# Allegro board aqs1_controller.brd
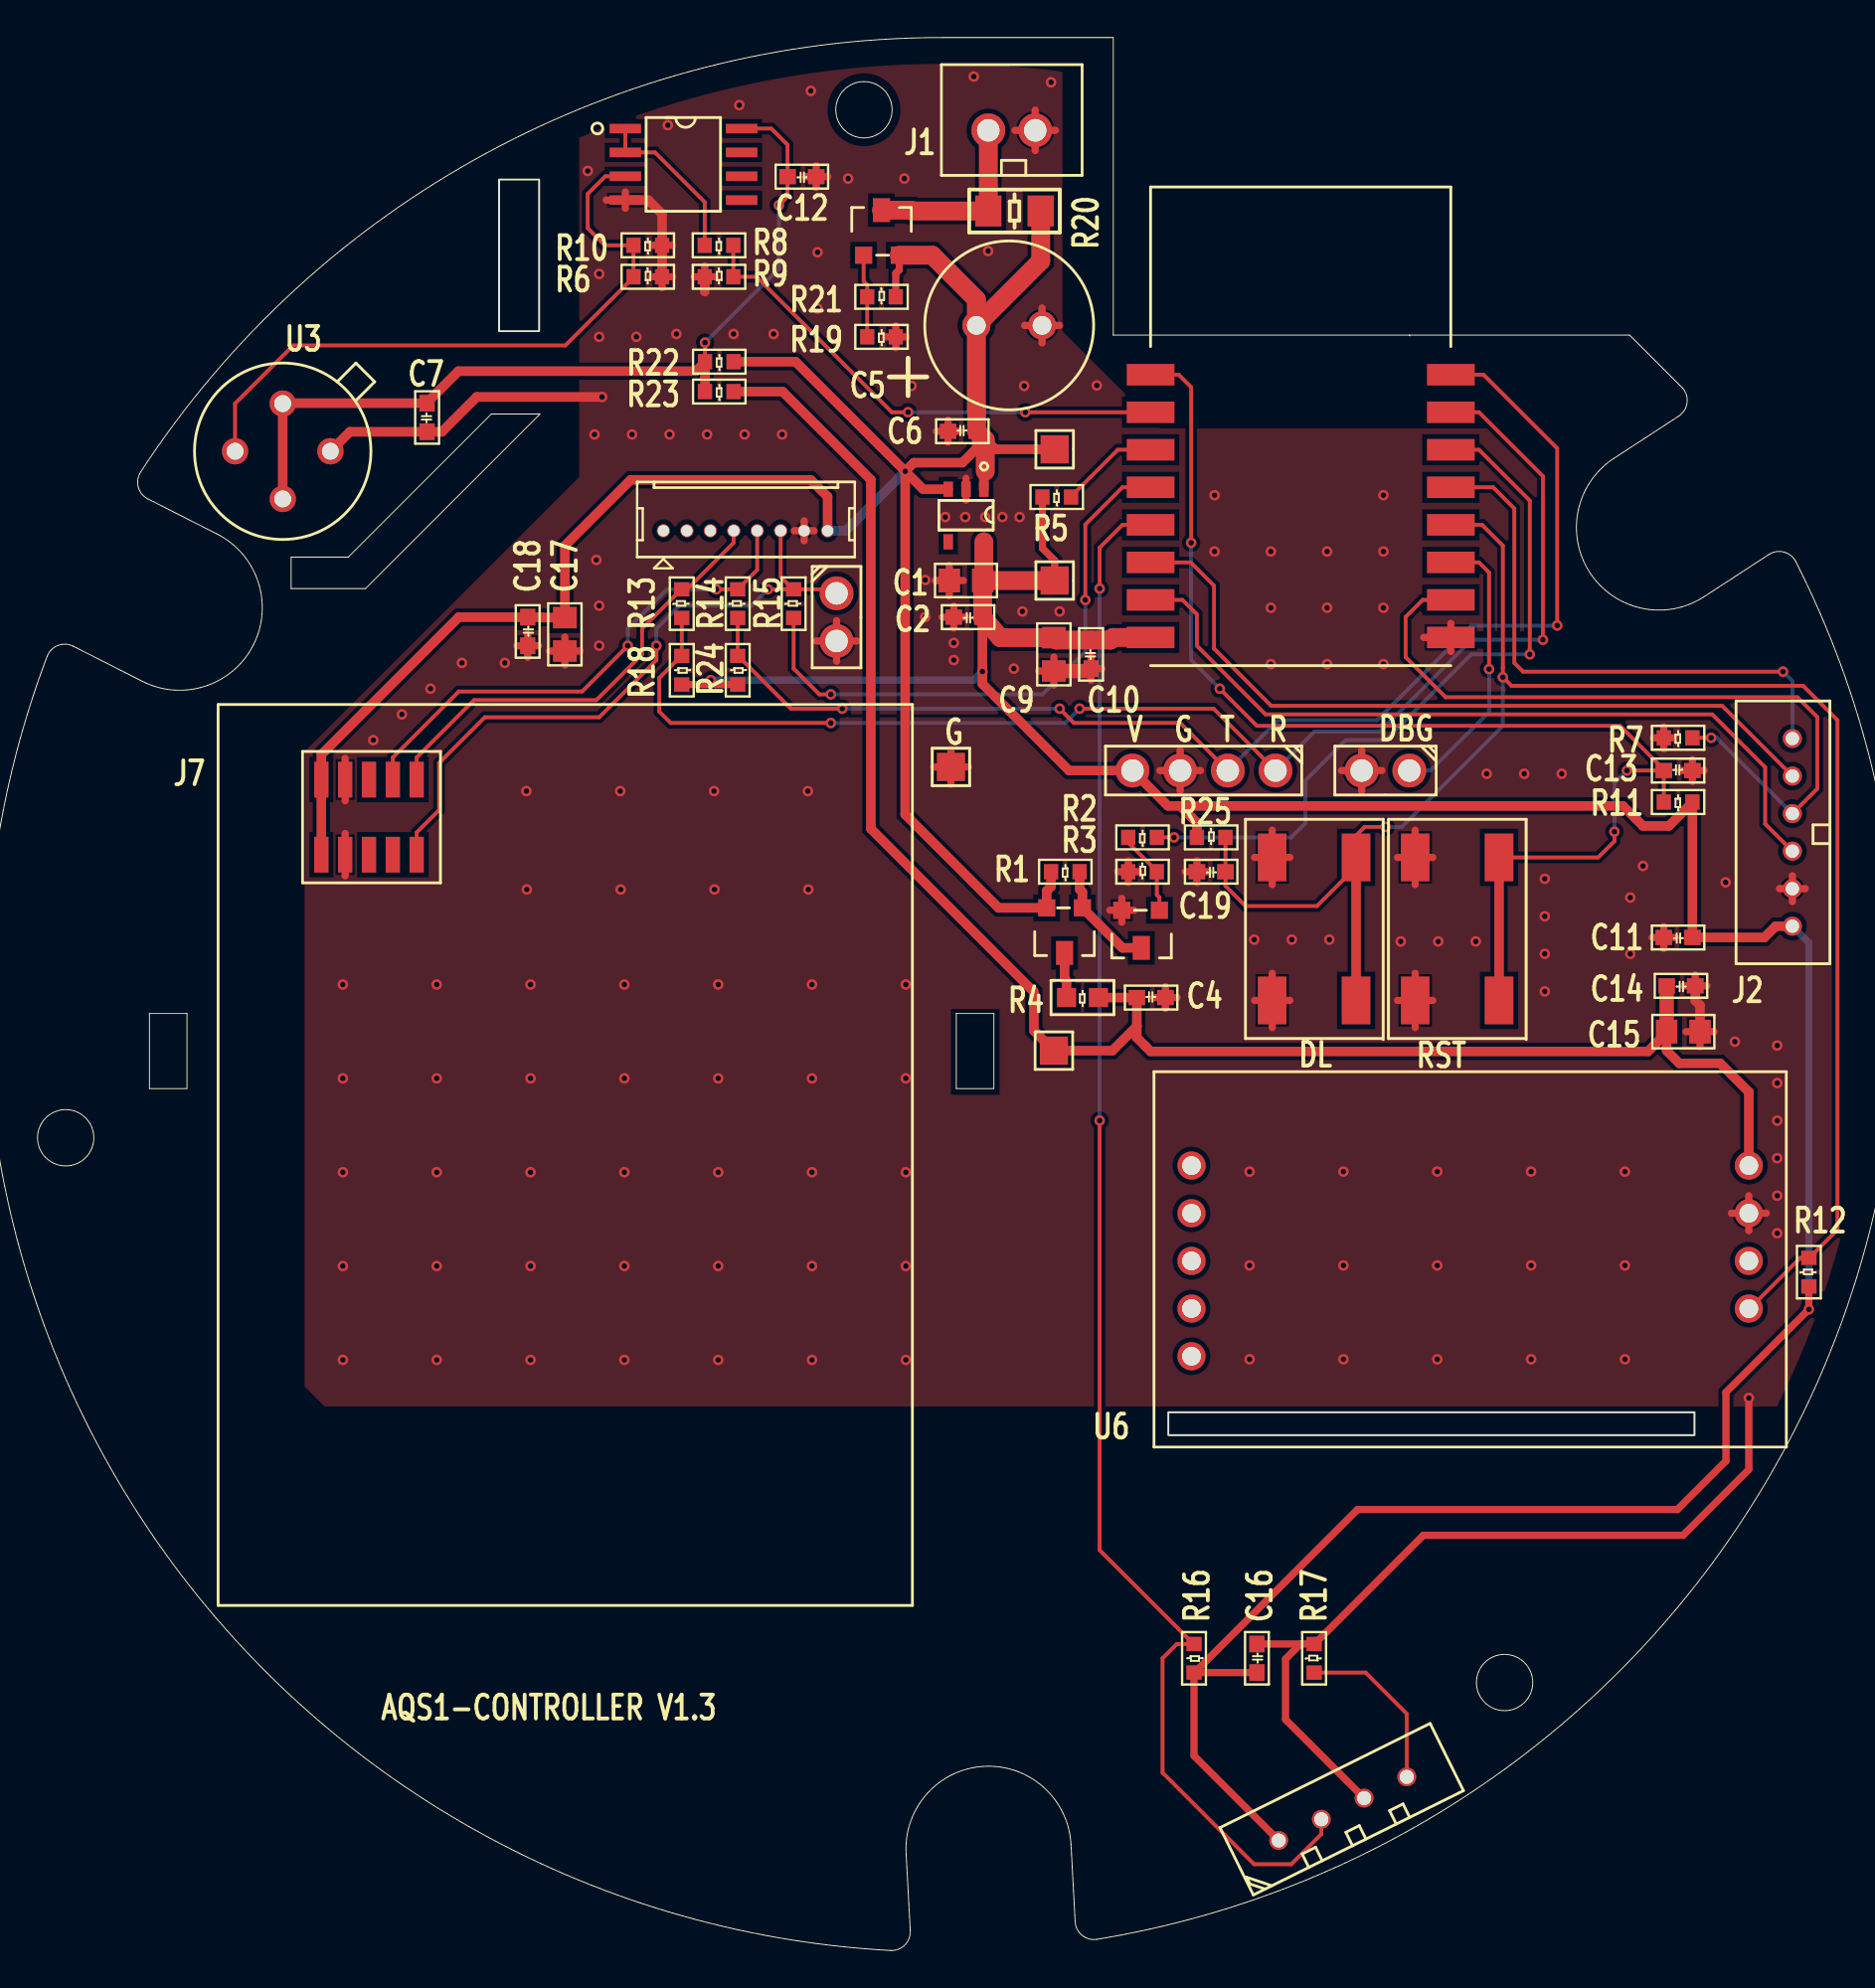
[diagram p0: board, top side]
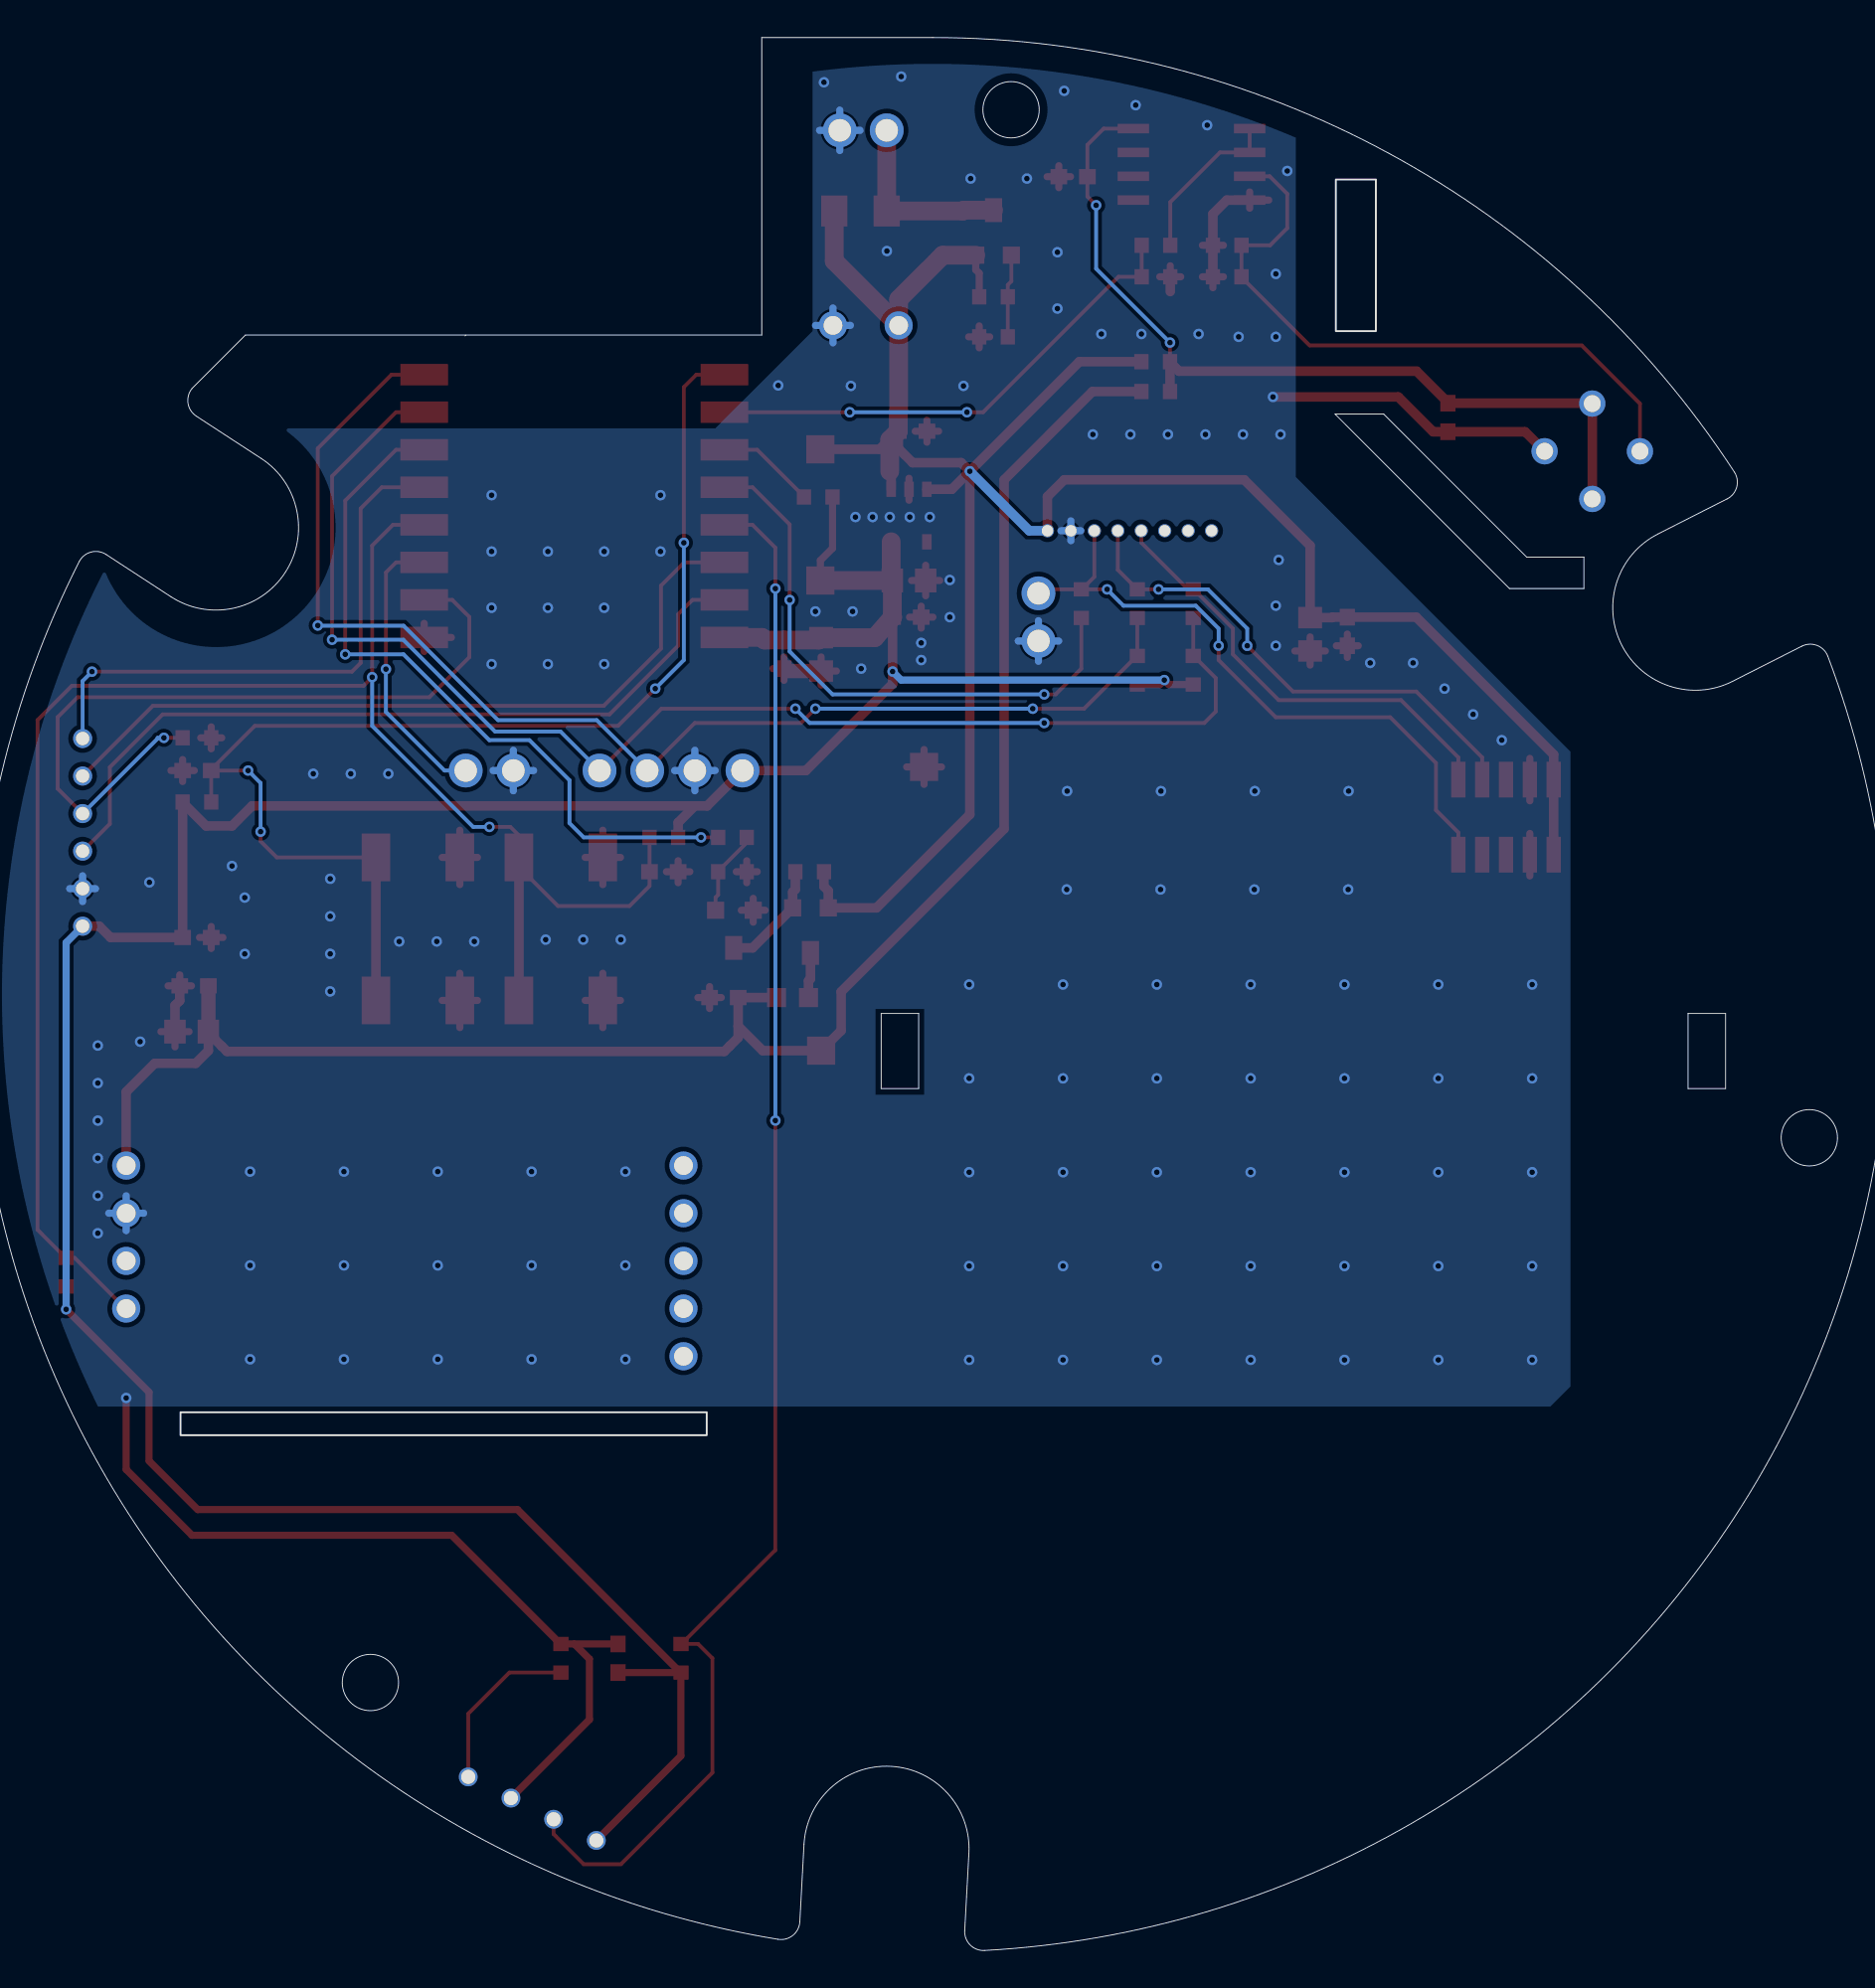
[diagram p1: board, bottom side, seen from below]

Outline 102 x 101.93 mm; copper layers: TOP, BOTTOM. Coordinates in mm from the lower left corner of the outline.
Outline path: circle c4.28,43.3 r1.5 ; rectangle 27.38,86.28 29.51,94.36 ; circle c46.82,98.08 r1.5 ; rectangle 63.04,27.46 91.08,28.67 ; circle c80.96,14.28 r1.5 ; 75.87,86.07 75.92,86.03 ; 3.29,68.96 arc(3.87,69.53) 4.68,69.49 8.37,67.62 arc(14.28,69.56) 12.35,75.47 8.66,77.34 arc(8.15,77.97) 8.28,78.78 arc(26.7,95.77) 51,101.93 60.11,101.93 60.11,86.07 87.62,86.07 90.47,83.23 arc(90.68,82.44) 90.24,81.75 86.78,79.5 arc(85.49,73.41) 91.58,72.13 95.04,74.38 arc(95.85,74.51) 96.48,74 arc(96.48,27.85) 59.24,0.59 arc(58.45,0.8) 58.08,1.53 57.85,5.65 arc(53.22,9.81) 49.07,5.18 49.29,1.05 arc(49,0.29) 48.24,0 arc(8.27,23.08) 3.29,68.96 ; 8.74,49.93 8.74,45.93 10.74,45.93 10.74,49.93 8.74,49.93 ; 16.29,74.24 16.29,72.57 20.26,72.57 29.55,81.86 26.96,81.86 19.34,74.24 16.29,74.24 ; 51.74,49.93 51.74,45.93 53.74,45.93 53.74,49.93 51.74,49.93

## Design rules (mm)
nets with their own width: min track width 0.381; nets +3.3V +5V GND SENSOR_5V

## Placement (name value [footprint] x y rotation side)
C1  10uF-SC0805  [SC0805]  52.26 72.99 0 top
C2  0.1uF-SC0603  [SC0603]  52.37 71.04 180 top
C4  0.1uF-SC0603  [SC0603]  62.12 50.77 0 top
C5  470uF/25V  [CAP8X11_5]  52.81 86.59 0 top
C6  0.1uF-SC0603  [SC0603]  52.07 80.95 0 top
C7  0.1uF-SC0603  [SC0603]  23.54 81.68 90 top
C9  10uF-SC0805  [SC0805]  56.94 69.06 270 top
C10  0.1uF-SC0603  [SC0603]  58.92 69.06 90 top
C11  0.1uF-SC0603  [SC0603]  90.21 53.97 180 top
C12  0.1uF-SC0603  [SC0603]  43.51 94.51 180 top
C13  0.1uF-SC0603  [SC0603]  90.21 62.87 0 top
C14  0.1uF-SC0603  [SC0603]  90.36 51.4 180 top
C15  10uF-SC0805  [SC0805]  90.49 48.96 0 top
C16  0.1uF-SC0603  [SC0603]  67.76 15.57 270 top
C17  10uF-SC0805  [SC0805]  30.88 70.13 270 top
C18  0.1uF-SC0603  [SC0603]  28.9 70.28 270 top
C19  0.1uF-SC0603  [SC0603]  65.32 57.48 180 top
J1  J2x1  [CON2_2M5]  50.95 100.48 270 top
J2  J6x1  [CON6_2M]  92.8 52.58 0 top
J3  CON4  [CON1X4_254]  68.75 62.87 270 top
J5  CON2  [CON1X2_254]  74.61 62.87 270 top
J6  CON8  [A1252WV_8P]  34.73 78.25 180 top
J7  CON10A  [PMS7003]  12.4 19.89 0 top
J8  CON2  [CON1X2_254]  45.36 71.04 0 top
Q1  MMBT3904  [SOT-23]  62.57 55.42 180 top
Q2  CJK2333  [SOT-23-3L]  58.46 55.55 180 top
Q3  CJK2333  [SOT-23-3L]  46.8 90.33 0 top
R1  20K-SR0603  [SR0603]  57.55 57.48 180 top
R2  2K-SR0603  [SR0603]  61.67 59.31 180 top
R3  10K-SR0603  [SR0603]  61.67 57.48 0 top
R4  MF-FSMF050X  [FUSE_SMD_0603]  58.47 50.77 180 top
R5  10K-SR0603  [SR0603]  57.09 77.44 180 top
R6  28K-SR0603  [SR0603]  35.3 89.18 0 top
R7  10K-SR0603  [SR0603]  90.21 64.61 180 top
R8  30K-SR0603  [SR0603]  39.1 90.85 180 top
R9  10K-SR0603  [SR0603]  39.1 89.18 0 top
R10  10M-SR0603  [SR0603]  35.3 90.85 180 top
R11  10K-SR0603  [SR0603]  90.21 61.19 180 top
R12  10K-SR0603  [SR0603]  97.18 36.14 90 top
R13  0-SR0603  [SR0603]  37.11 71.76 90 top
R14  0-SR0603  [SR0603]  40.09 71.76 90 top
R15  0-SR0603  [SR0603]  43.07 71.76 90 top
R16  10K-SR0603  [SR0603]  64.41 15.57 270 top
R17  10K-SR0603  [SR0603]  70.81 15.57 90 top
R18  10K-SR0603  [SR0603]  37.11 68.21 270 top
R19  20K-SR0603  [SR0603]  47.76 85.98 180 top
R20  0-SR1206-NC  [SR1206]  54.84 92.68 180 top
R21  10K-SR0603-NC  [SR0603]  47.76 88.11 0 top
R22  0-SR0603  [SR0603]  39.11 84.65 180 top
R23  0-SR0603-NC  [SR0603]  39.11 83.06 180 top
R24  10K-SR0603  [SR0603]  40.09 68.21 270 top
R25  10K-SR0603  [SR0603]  65.32 59.31 0 top
TP1  SIG  [SMD_SIG_60]  56.98 72.99 0 top
TP3  SIG  [SMD_SIG_60]  51.46 63.06 0 top
TP4  SIG  [SMD_SIG_60]  56.94 47.94 0 top
TP5  SIG  [SMD_SIG_60]  56.98 79.98 0 top
U1  SPX3819  [SOT23-5]  52.26 76.46 270 top
U2  -  [ESP-12S]  62.1 83.96 270 top
U3  GSBT11-D18  [HCHO]  15.85 79.88 0 top
U4  lm358  [SOIC8-50-244]  37.2 95.17 0 top
U5  BUTTON  [SW-4]  78.43 54.43 180 top
U6  -  [CM1106]  64.28 41.82 0 top
U7  -  [DHT12]  68.92 5.86 26.4 top
U8  BUTTON  [SW-4]  70.81 54.43 180 top

## Library data of the parts
C1 C2 C4 C6 C7 C9-C11 C13-C19 = CAP NP
C5 = CAP POL
C12 = CAP NP: room: USB+5V
J1 = J2x1
J2 = J6x1
J3 = CON4
J5 J8 = CON2
J6 = CON8
J7 = CON10A
Q1 = 2N1069
Q2 Q3 = PMOS
R1-R25 = R
TP1 TP3-TP5 = TP-SQ_1
U1 = SPX3819
U2 = ESP-07
U3 = HCHO
U4 = lm358
U5 U8 = BUTTON
U6 = CM1106
U7 = DHT12

## Footprints (pads in the part's own frame, mm; a bottom-side part is the same pattern mirrored in y, then rotated)
A1252WV_8P
  round 0.7 hole 0.6: 1(-10.15,2.6) 2(-8.9,2.6) 3(-7.65,2.6) 4(-6.4,2.6) 5(-5.15,2.6) 6(-3.9,2.6) 7(-2.65,2.6) 8(-1.4,2.6)
CAP8X11_5
  round 1.5 hole 1: 1(0,0) 2(3.5,0)
CM1106
  round 1.5 hole 1: 1(0,0) 2(0,-2.54) 3(0,-5.08) 4(0,-7.62) 5(0,-10.16) 6(29.7,0) 7(29.7,-2.54) 8(29.7,-5.08) 9(29.7,-7.62)
CON1X2_254
  round 1.8 hole 1.2: 1(0,1.27) 2(0,-1.27)
CON1X4_254
  round 1.8 hole 1.2: 1(0,0) 2(0,-2.54) 3(0,-5.08) 4(0,-7.62)
CON2_2M5
  round 1.8 hole 1.2: 1(3.5,2.5) 2(3.5,5)
CON6_2M
  round 1.016 hole 0.711: 1(3.5,2) 2(3.5,4) 3(3.5,6) 4(3.5,8) 5(3.5,10) 6(3.5,12)
DHT12
  round 1 hole 0.75: 1(0,0) 2(2.54,0) 3(5.08,0) 4(7.62,0)
ESP-12S
  rect 1.143x2.54 smd: 1(0,0) 2(2,0) 3(4,0) 4(6,0) 5(8,0) 6(10,0) 7(12,0) 8(14,0) 9(14,16) 10(12,16) 11(10,16) 12(8,16) 13(6,16) 14(4,16) 15(2,16) 16(0,16)
FUSE_SMD_0603
  rect 1.016x1.016 smd: 1(0.85,0) 2(-0.85,0)
HCHO
  round 1.4 hole 0.9: 1(0,2.54) 2(2.54,0) 3(0,-2.54) 4(-2.54,0)
PMS7003
  rect 0.762x1.905 smd: 1(5.5,42.5) 2(5.5,38.5) 3(6.77,42.5) 4(6.77,38.5) 5(8.04,42.5) 6(8.04,38.5) 7(9.31,42.5) 8(9.31,38.5) 9(10.58,42.5) 10(10.58,38.5)
SC0603
  rect 0.889x0.813 smd: 1(-0.762,0) 2(0.762,0)
SC0805
  rect 1.143x1.27 smd: 1(-0.889,0) 2(0.889,0)
SMD_SIG_60
  rect 1.5x1.5 smd: 1(0,0)
SOIC8-50-244
  rect 1.676x0.508 smd: 1(-3.099,1.905) 2(-3.099,0.635) 3(-3.099,-0.635) 4(-3.099,-1.905) 5(3.099,-1.905) 6(3.099,-0.635) 7(3.099,0.635) 8(3.099,1.905)
SOT23-5
  rect 0.813x0.508 smd: 1(-1.4,0.95) 2(-1.4,0) 3(-1.4,-0.95) 4(1.4,-0.95) 5(1.399,0.95)
SOT-23
  rect 0.914x0.914 smd: 1(0,0) 2(2.005,0)
  rect 0.914x1.27 smd: 3(0.965,2.005)
SOT-23-3L
  rect 0.914x0.914 smd: 1(0,0) 2(1.9,0)
  rect 0.914x1.27 smd: 3(0.95,2.4)
SR0603
  rect 0.762x0.813 smd: 1(-0.762,0) 2(0.762,0)
SR1206
  rect 1.397x1.651 smd: 1(-1.397,0) 2(1.397,0)
SW-4
  rect 1.524x2.54 smd: 1(-2.235,3.81) 2(2.235,3.81) 3(-2.235,-3.81) 4(2.235,-3.81)

## Nets
+3.3V: C1.2 C2.1 C9.1 C10.2 C11.1 C16.2 J2.1 J3.4 R5.2 R11.1 R12.1 R16.2 R18.2 R24.2 R25.1 TP1.1 U1.5(VOUT) U2.8(VCC) U7.1(VDD)
+5V: C5.1 C6.2 C17.1 C18.1 J6.1 J7.1 J7.2 Q2.2(S) Q3.2(S) R1.2 R20.1 R21.2 R22.1 TP5.1 U1.1(VI N) U1.3(EN)
GND: C1.1 C2.2 C4.2 C5.2 C6.1 C7.1 C9.2 C10.1 C11.2 C12.1 C13.2 C14.1 C15.2 C16.1 C17.2 C18.2 C19.2 J1.2 J2.2 J3.3 J5.2 J6.2 J7.3 J7.4 J8.2 Q1.2(E) R3.1 R6.2 R7.2 R9.1 R10.1 R17.2 R19.1 TP3.1 U1.2(GND) U2.9(GND) U3.2 U4.4(GND) U5.2 U5.4 U6.7(GND) U7.3(GND) U8.2 U8.4
VCC_IN: J1.1 Q3.3(D) R20.2
AD: R6.1 R10.2 U3.4 U4.3(IN1+)
CO2_PWM: C19.1 R12.2 R25.2 U2.12(GPIO0) U6.9(PWM) U8.1 U8.3
DEBUG_T: J5.1 U2.11(GPIO2)
HCHO_POWER: C7.2 C12.2 R22.2 R23.2 U3.1 U3.3 U4.8(VCC)
ID_BUTTON: J2.3 U2.7(GPIO13)
IO4: J2.6 U2.13(GPIO4)
IO12: J2.5 U2.6(GPIO12)
IO15: J2.4 R7.1 U2.10(GPIO15)
IO16: R15.1 U2.4(GPIO16)
PM_R: J6.4 J7.7 R14.2
PM_SET: J6.3 J7.10 J8.1 R15.2
PM_T: J6.5 J7.9 R13.2
RXD: J3.1 R13.1 R18.1 U2.15(RXD)
SDA: R16.1 U2.5(GPIO14) U7.2(SDA)
SENSOR_5V: C4.1 C14.2 C15.1 R4.2 R23.1 TP4.1 U6.6(VCC)
SENSOR_POWER: R2.1 U2.14(GPIO5)
TXD: J3.2 R14.1 R24.1 U2.16(TXD)
VOC_AD: R8.1 R9.2 U2.2(ADC)
WIFI_RST: C13.1 R11.2 U2.1(RESET) U5.1 U5.3
N16844653: R5.1 U2.3(CH_PD)
N17234915: Q2.3(D) R4.1
N17234940: Q1.3(C) Q2.1(G) R1.1
N17269842: R8.2 U4.1(OUT1) U4.2(IN1-)
N17294875: R17.1 U7.4(SCL)
N17309693: Q1.1(B) R2.2 R3.2
N17330411: Q3.1(G) R19.2 R21.1

Pads without a net: J6 6 7 8; J7 5 6 8; U1 4; U4 5 6 7; U6 1 2 3 4 5 8

## Via types
v1: diameter 0.559, hole 0.305, TOP to BOTTOM, 175 vias

## Routing (per net, layer and track width the routed paths; a pad name or vN(x,y) marks a point on that pad's centre or on a via; arc(x,y) is an arc through that point)
+3.3V: length 179
  TOP w0.381: U7.1 64.41,10.37 R16.2 64.44,14.81 ; R5.2 56.33,74.71 56.98,74.06 TP1.1 ; 64.44,14.81 73.12,23.49 90.17,23.49 92.76,26.08 92.76,29.74 v1(97.18,34.16) R12.1 ; 64.44,14.81 C16.2 ; R24.2 38.89,67.45 v1(38.65,67.69) 38.42,67.45 R18.2 ; 53.13,70.58 C2.1
  TOP w0.508: 90.97,61.17 89.72,59.92 88.34,59.92 87.27,60.98 63.67,60.98 ; 90.97,61.17 R11.1 ; 90.97,61.17 C11.1 94.81,53.97 95.41,54.58 J2.1 ; R25.1 64.56,60.09 63.67,60.98 ; 63.67,60.98 63.02,60.98 J3.4 57.75,62.87 53.13,67.49 v1(53.13,68.15) 53.13,70.58
  TOP w1: U1.5 53.21,73.06 C1.2 ; U2.8 60.09,69.96 59.96,69.82 C10.2 57.07,69.82 C9.1 54.08,69.95 C2.1 53.15,71.14 C1.2 ; C1.2 TP1.1
  BOTTOM w0.381: v1(53.13,68.15) 52.68,67.69 v1(38.65,67.69) ; v1(97.18,34.16) 97.18,53.7 J2.1
+5V: length 127.5
  TOP w0.381: R21.2 48.52,89.37 48.7,89.55 Q3.2
  TOP w0.508: TP5.1 53.83,79.98 52.87,80.95 C6.2 52.83,80.03 52.07,79.27 49.47,79.27 v1(49.02,78.81) ; J6.1 44.88,77.46 43.99,78.36 34.39,78.36 30.88,74.85 C17.1 29.71,71.02 29.69,71.04 C18.1 25.23,71.04 17.9,63.72 J7.1 J7.2 ; U1.3 49.98,77.86 v1(49.02,78.81) ; R1.2 56.79,56.69 56.56,56.46 Q2.2 53.99,55.55 49.02,60.53 v1(49.02,78.81) ; v1(49.02,78.81) 43.18,84.65 R22.1 ; U1.1 53.21,78.74 53.28,78.81
  TOP w1: C5.1 52.81,87.98 50.46,90.33 Q3.2 ; C5.1 56.24,90.02 R20.1 ; C5.1 52.81,82 52.83,81.98 C6.2 53.28,80.49 53.28,78.81
  BOTTOM w0.508: J6.1 45.85,75.65 v1(49.02,78.81)
GND: length 211.5
  TOP w0.381: C13.2 91.59,62.87 ; C13.2 90.35,62.87 ; C13.2 90.97,62.28 ; C13.2 90.97,63.45 ; 35.5,89.18 R6.2 ; R6.2 36.62,89.18 ; R6.2 36.06,88.59 ; U5.4 76.2,59.69 ; U5.4 77.14,58.24 ; U5.4 76.2,56.79 ; U5.4 75.26,58.24 ; J5.2 73.34,63.95 ; J5.2 74.42,62.87 ; J5.2 72.27,62.87 ; J5.2 73.34,61.79 ; U8.2 69.52,50.62 ; U8.2 68.58,52.07 ; U8.2 68.58,49.17 ; U8.2 67.64,50.62 ; 70.09,16.33 R17.2 70.84,16.33 76.63,22.12 90.47,22.12 93.98,25.63 v1(93.98,29.44) ; 70.09,16.33 69.29,15.53 69.29,12.3 U7.3 ; 70.09,16.33 C16.1 ; 54.87,96.98 J1.2 ; J1.2 55.95,98.06 ; J1.2 55.95,95.9 ; J1.2 57.03,96.98 ; Q1.2 60.56,56.06 ; Q1.2 61.2,55.42 ; Q1.2 60.56,54.79 ; Q1.2 59.93,55.42 ; 58.92,67.68 C10.1 ; C10.1 58.92,68.92 ; C10.1 59.51,68.3 ; C10.1 58.34,68.3 ; 34.1,92.83 U4.4 ; U4.4 33.09,93.26 ; U4.4 34.1,93.7 ; C4.2 62.89,51.36 ; C4.2 62.89,50.19 ; C4.2 62.26,50.77 ; C4.2 63.51,50.77 ; 56.31,85.66 C5.2 ; C5.2 57.24,86.59 ; C5.2 55.38,86.59 ; C5.2 56.31,87.51 ; C17.2 31.7,69.24 ; C17.2 30.88,69.99 ; C17.2 30.88,68.49 ; C17.2 30.07,69.24 ; R19.1 49.08,85.98 ; R19.1 48.52,86.56 ; R19.1 47.96,85.98 ; R19.1 48.52,85.39 ; C15.2 92.12,48.96 ; C15.2 91.37,48.14 ; C15.2 90.63,48.96 ; 45.36,68.69 J8.2 ; J8.2 44.28,69.77 ; J8.2 46.44,69.77 ; J8.2 45.36,70.85 ; C12.1 44.27,95.1 ; C12.1 43.65,94.51 ; C12.1 44.27,93.93 ; C12.1 44.9,94.51 ; 35.5,90.85 R10.1 36.62,90.85 ; 88.82,53.97 C11.2 ; C11.2 89.44,54.56 ; C11.2 89.44,53.39 ; C11.2 90.07,53.97 ; 64.56,56.89 C19.2 ; C19.2 64.56,58.06 ; C19.2 63.94,57.48 ; C19.2 65.18,57.48 ; 90.5,51.4 91.12,51.4 ; 91.12,51.4 91.12,51.98 ; 91.12,51.4 91.74,51.4 ; J2.2 96.3,57.26 ; J2.2 96.98,56.58 ; J2.2 96.3,55.89 ; J2.2 95.61,56.58 ; C18.2 28.9,70.14 ; C18.2 28.9,68.9 ; C18.2 28.32,69.52 ; C18.2 29.49,69.52 ; 68.58,56.79 U8.4 ; U8.4 68.58,59.69 ; U8.4 69.52,58.24 ; U8.4 67.64,58.24 ; 19.17,57.26 J7.4 19.17,59.52 ; 51.37,72.18 C1.1 ; C1.1 51.37,73.81 ; C1.1 52.12,72.99 ; C1.1 50.62,72.99 ; R9.1 38.34,89.76 ; R9.1 37.78,89.18 ; R9.1 38.89,89.18 ; 63.67,61.79 J3.3 ; J3.3 63.67,63.95 ; J3.3 62.59,62.87 ; J3.3 64.75,62.87 ; 75.26,50.62 U5.2 ; U5.2 77.14,50.62 ; U5.2 76.2,49.17 ; U5.2 76.2,52.07 ; C6.1 51.93,80.95 ; C6.1 51.3,80.36 ; C6.1 51.3,81.53 ; C6.1 50.68,80.95 ; C2.2 51.61,71.63 ; C2.2 50.99,71.04 ; C2.2 52.23,71.04 ; C2.2 51.61,70.46 ; 89.44,64.03 R7.2 ; R7.2 90,64.61 ; R7.2 88.89,64.61 ; R7.2 89.44,65.2 ; 52.26,77.27 U1.2 52.26,78.44 ; 60.9,56.89 R3.1 ; R3.1 60.9,58.06 ; R3.1 61.46,57.48 ; R3.1 60.35,57.48 ; J6.2 43.63,76.17 ; J6.2 43.63,75.12 ; J6.2 43.1,75.65 ; J6.2 44.16,75.65 ; 76.65,69.96 U2.9 ; U2.9 78.1,70.71 ; U2.9 78.1,69.21 ; U6.7 94.9,39.28 ; U6.7 93.98,40.21 ; U6.7 93.05,39.28 ; U6.7 93.98,38.35 ; 51.46,62.13 TP3.1 ; TP3.1 52.38,63.06 ; TP3.1 50.53,63.06 ; TP3.1 51.46,63.99 ; 56.13,68.17 C9.2 ; C9.2 56.94,67.42 ; C9.2 56.94,68.92 ; 19.17,61.26 J7.3 19.17,63.52
  TOP w0.508: v1(32.86,82.78) 26.19,82.78 24.33,80.92 C7.1 19.42,80.92 U3.2 ; 38.34,88.39 R9.1 ; C15.2 91.37,50.35 91.12,50.61 91.12,51.4 ; U4.4 35.32,93.26 36.06,92.52 R10.1 R6.2
  TOP w0.762: C9.2 58.8,68.17 C10.1
  BOTTOM w0.381: J1.2 57.03,96.98 ; J1.2 55.95,98.06 ; J1.2 55.95,95.9 ; J1.2 54.87,96.98 ; 56.31,85.66 C5.2 ; C5.2 57.24,86.59 ; C5.2 56.31,87.51 ; C5.2 55.38,86.59 ; 44.28,69.77 J8.2 ; J8.2 46.44,69.77 ; J8.2 45.36,70.85 ; J8.2 45.36,68.69 ; J6.2 43.63,76.17 ; J6.2 44.16,75.65 ; J6.2 43.1,75.65 ; J6.2 43.63,75.12 ; 73.34,61.79 J5.2 ; J5.2 73.34,63.95 ; J5.2 72.27,62.87 ; J5.2 74.42,62.87 ; U6.7 93.98,40.21 ; U6.7 93.98,38.35 ; U6.7 93.05,39.28 ; U6.7 94.9,39.28 ; 96.3,55.89 J2.2 ; J2.2 95.61,56.58 ; J2.2 96.3,57.26 ; J2.2 96.98,56.58 ; J3.3 63.67,63.95 ; J3.3 62.59,62.87 ; J3.3 64.75,62.87 ; J3.3 63.67,61.79
  vias: v1(19.05,51.47) v1(19.05,46.47) v1(19.05,41.47) v1(19.05,36.47) v1(19.05,31.47) v1(20.67,64.49) v1(22.2,65.86) v1(23.72,67.23) v1(24.05,51.47) v1(24.05,46.47) v1(24.05,41.47) v1(24.05,36.47) v1(24.05,31.47) v1(25.4,68.6) v1(27.68,68.6) v1(28.83,61.77) v1(28.86,56.53) v1(29.05,51.47) v1(29.05,46.47) v1(29.05,41.47) v1(29.05,36.47) v1(29.05,31.47) v1(32.1,94.82) v1(32.46,80.78) v1(32.56,74.09) v1(32.71,89.33) v1(32.71,85.98) v1(32.71,71.65) v1(32.71,69.52) v1(33.83,61.77) v1(33.86,56.53) v1(34.05,51.47) v1(34.05,46.47) v1(34.05,41.47) v1(34.05,36.47) v1(34.05,31.47) v1(34.46,80.78) v1(34.69,85.98) v1(36.37,97.25) v1(36.46,80.78) v1(36.83,86.13) v1(38.46,80.78) v1(38.83,61.77) v1(38.86,56.53) v1(39.05,51.47) v1(39.05,46.47) v1(39.05,41.47) v1(39.05,36.47) v1(39.05,31.47) v1(39.87,86.13) v1(40.18,98.32) v1(40.46,80.78) v1(42.01,86.13) v1(42.46,80.78) v1(43.83,61.77) v1(43.86,56.53) v1(43.99,99.08) v1(44.05,51.47) v1(44.05,46.47) v1(44.05,41.47) v1(44.05,36.47) v1(44.05,31.47) v1(44.35,90.48) v1(44.35,87.48) v1(45.98,94.41) v1(48.98,94.41) v1(49.05,51.47) v1(49.05,46.47) v1(49.05,41.47) v1(49.05,36.47) v1(49.05,31.47) v1(49.36,83.36) v1(50.08,73.02) v1(50.08,71.04) v1(51.15,76.38) v1(51.61,69.67) v1(51.61,68.76) v1(52.22,76.38) v1(52.68,99.85) v1(53.28,76.38) v1(53.44,90.55) v1(54.2,76.38) v1(54.81,68.3) v1(55.11,76.38) v1(55.27,71.35) v1(55.36,83.36) v1(56.79,99.54) v1(57.25,71.35) v1(59.23,83.39) v1(65.5,77.54) v1(65.5,74.54) v1(67.37,41.5) v1(67.37,36.5) v1(67.37,31.5) v1(67.62,53.86) v1(68.5,74.54) v1(68.5,71.54) v1(68.5,68.54) v1(69.62,53.86) v1(71.5,74.54) v1(71.5,71.54) v1(71.5,68.54) v1(71.62,53.86) v1(72.37,41.5) v1(72.37,36.5) v1(72.37,31.5) v1(74.5,77.54) v1(74.5,74.54) v1(74.5,71.54) v1(74.5,68.54) v1(75.43,53.76) v1(77.43,53.76) v1(77.37,41.5) v1(77.37,36.5) v1(77.37,31.5) v1(79.43,53.76) v1(80.01,62.7) v1(82.01,62.7) v1(82.37,41.5) v1(82.37,36.5) v1(82.37,31.5) v1(83.1,57.1) v1(83.1,55.1) v1(83.1,53.1) v1(83.1,51.1) v1(84.01,62.7) v1(87.37,41.5) v1(87.37,36.5) v1(87.37,31.5) v1(87.66,56.1) v1(87.66,53.1) v1(88.34,57.78) v1(92.74,56.91) v1(93.23,48.42) v1(95.49,48.22) v1(95.49,46.22) v1(95.49,44.22) v1(95.49,42.22) v1(95.49,40.22) v1(95.49,38.22)
VCC_IN: length 10
  TOP w1: Q3.3 49.34,92.73 49.38,92.68 R20.2 J1.1
AD: length 35.3
  TOP w0.203: U3.4 13.31,82.42 16.4,85.52 30.91,85.52 34.54,89.15 R6.1 R10.2 33.02,90.85 32.1,91.77 32.1,93.6 33.04,94.53 U4.3
CO2_PWM: length 95.1
  TOP w0.203: R25.2 C19.1 66.09,56.72 67.15,55.65 70.96,55.65 73.05,57.73 ; v1(74.62,59.87) 73.5,59.87 73.05,59.41 U8.3 ; U6.9 94.02,34.2 96.72,36.9 R12.2 97.2,36.9 98.7,38.4 98.7,65.56 96.87,67.38 81.33,67.38 v1(80.87,67.84) 80.87,68.35 80.87,68.35 80.87,74.85 79.76,75.96 U2.12
  TOP w0.508: U8.3 U8.1
  BOTTOM w0.203: v1(80.87,67.84) 80.87,65.25 75.48,59.87 v1(74.62,59.87)
DEBUG_T: length 15.2
  TOP w0.203: v1(80.13,68.27) 80.13,73.42 79.59,73.96 U2.11
  BOTTOM w0.203: J5.1 77.01,62.87 80.13,65.99 v1(80.13,68.27)
HCHO_POWER: length 46.3
  TOP w0.203: v1(38.35,85.67) R22.2 ; v1(42.29,92.99) 42.75,93.45 C12.2 42.75,96.21 41.88,97.07 U4.8
  TOP w0.508: 38.35,84.63 37.87,84.15 25.21,84.15 23.54,82.48 C7.2 15.87,82.44 U3.1 U3.3 ; 38.35,84.63 R23.2 ; 38.35,84.63 R22.2
  BOTTOM w0.203: v1(38.35,85.67) 42.29,89.61 v1(42.29,92.99)
ID_BUTTON: length 42.5
  TOP w0.203: U2.7 63.8,71.96 64.56,71.19 64.56,69.52 68.22,65.86 92.03,65.86 94.85,63.04 94.85,60.03 J2.3
IO4: length 30.4
  TOP w0.203: v1(95.8,68.14) 81.94,68.14 81.48,68.6 81.48,76.83 80.35,77.96 U2.13
  BOTTOM w0.203: J2.6 96.3,67.64 v1(95.8,68.14)
IO12: length 40.9
  TOP w0.203: U2.6 64.23,73.96 65.48,72.72 65.48,69.37 68.52,66.32 92.55,66.32 J2.5
IO15: length 40.9
  TOP w0.203: R7.1 v1(91.97,64.61) ; J2.4 97.63,61.9 97.63,65.71 96.57,66.77 77.82,66.77 75.69,68.91 75.69,71.05 76.6,71.96 U2.10
  BOTTOM w0.203: J2.4 92.3,64.57 92.3,64.61 v1(91.97,64.61)
IO16: length 30.8
  TOP w0.203: v1(58.62,71.96) 58.62,75.98 60.6,77.96 U2.4 ; v1(45.06,66.93) 44.45,66.93 43.07,68.3 R15.1
  BOTTOM w0.203: v1(58.62,71.96) 58.62,69.21 56.33,66.93 v1(45.06,66.93)
PM_R: length 27.4
  TOP w0.203: v1(38.96,72.52) R14.2 41.13,73.56 J6.4 ; v1(34.23,69.52) 31.8,67.08 25.23,67.08 21.71,63.57 J7.7
  BOTTOM w0.203: v1(38.96,72.52) 36.33,72.52 34.23,70.43 v1(34.23,69.52)
PM_SET: length 34.9
  TOP w0.203: J6.3 42.38,73.19 43.05,72.52 ; J8.1 45.15,72.52 R15.2 43.05,72.52 ; 43.05,72.52 v1(41.7,72.52) ; v1(35.76,69.52) 35.76,68.76 32.71,65.71 26.61,65.71 24.18,63.27 24.18,60.76 22.98,59.57 J7.10
  BOTTOM w0.203: v1(35.76,69.52) 35.76,70.43 36.98,71.65 40.83,71.65 v1(41.7,72.52)
PM_T: length 24.3
  TOP w0.203: J6.5 39.87,75.64 39.87,75 37.39,72.52 R13.2 37.09,72.52 35,70.43 35,69.06 32.56,66.62 26.04,66.62 22.98,63.57 J7.9
RXD: length 72.4
  TOP w0.203: v1(83,69.84) 83,78.55 79.59,81.96 U2.15 ; R13.1 R18.1 37.09,68.98 35.91,67.8 35.91,66.01 36.52,65.4 v1(45.06,65.4) ; v1(58.31,66.17) 65.45,66.17 J3.1
  BOTTOM w0.203: v1(83,69.84) 79.21,69.84 74.32,64.95 70.83,64.95 J3.1 ; v1(58.31,66.17) 57.55,65.4 v1(45.06,65.4)
SDA: length 83.7
  TOP w0.203: v1(59.38,44.22) 59.38,21.33 64.38,16.33 ; U2.5 60.6,75.96 59.38,74.74 v1(59.38,72.57) ; U7.2 71.2,6.2 69.59,4.6 67.61,4.6 62.73,9.47 62.73,15.57 63.5,16.33 64.38,16.33 ; 64.38,16.33 R16.1
  BOTTOM w0.203: v1(59.38,44.22) v1(59.38,72.57)
SENSOR_5V: length 94.5
  TOP w0.508: 61.36,49.25 60.06,47.94 TP4.1 55.88,49.01 55.88,51.08 47.19,59.76 47.19,78.36 42.48,83.06 R23.1 ; 61.36,49.25 61.36,48.64 61.82,48.18 62.1,47.9 88.6,47.9 88.88,48.18 89.6,48.89 ; 61.36,49.25 C4.1 R4.2 ; 89.6,48.89 89.6,47.94 90.27,47.27 92.45,47.27 93.98,45.74 U6.6 ; 89.6,48.89 C15.1
  TOP w0.762: C14.2 C15.1
SENSOR_POWER: length 38.8
  TOP w0.203: U2.14 79.59,79.96 82.3,77.25 v1(82.3,69.06) ; v1(63.34,59.31) R2.1
  BOTTOM w0.203: v1(63.34,59.31) 69.59,59.31 70.35,60.07 70.35,62.36 72.49,64.49 74.62,64.49 79.19,69.06 v1(82.3,69.06)
TXD: length 68.2
  TOP w0.203: v1(83.76,70.6) 83.76,80.03 79.84,83.96 U2.16 ; v1(45.66,66.17) 42.93,66.17 40.12,68.98 R24.1 R14.1 ; J3.2 63.68,65.4 58.01,65.4 v1(57.25,66.17)
  BOTTOM w0.203: J3.2 68.9,65.56 74.16,65.56 79.19,70.58 83.75,70.58 v1(83.76,70.6) ; v1(45.66,66.17) v1(57.25,66.17)
VOC_AD: length 26.9
  TOP w0.203: U2.2 v1(55.42,81.96) ; v1(49.17,81.96) 48.31,81.96 41.09,89.18 R9.2 R8.1
  BOTTOM w0.203: v1(49.17,81.96) v1(55.42,81.96)
WIFI_RST: length 66.4
  TOP w0.203: v1(65.78,67.23) 67.76,65.25 87.12,65.25 89.44,62.92 C13.1 ; U5.3 85.95,58.24 86.81,59.1 v1(86.81,59.61) ; v1(64.26,75) 64.26,83.3 63.59,83.96 U2.1 ; C13.1 R11.2 ; C13.1 v1(87.48,62.87)
  TOP w0.508: U5.3 U5.1
  BOTTOM w0.203: v1(87.48,62.87) 86.81,62.2 v1(86.81,59.61) ; v1(65.78,67.23) 64.26,68.76 v1(64.26,75)
N16844653: length 5.3
  TOP w0.203: U2.3 60.35,79.96 57.86,77.47 R5.1
N17234915: length 2.4
  TOP w0.508: R4.1 57.62,51.66 57.51,51.77 Q2.3
N17234940: length 6
  TOP w0.508: R1.1 58.31,56.54 58.46,56.39 Q2.1 60.59,53.42 Q1.3
N17269842: length 8.9
  TOP w0.203: U4.1 U4.2 35.69,95.8 38.34,93.15 R8.2
N17294875: length 9.2
  TOP w0.203: R17.1 73.55,14.81 75.75,12.61 U7.4
N17309693: length 4.6
  TOP w0.203: R2.2 60.9,59.03 62.43,57.5 R3.2 62.43,56.25 62.57,56.11 Q1.1
N17330411: length 4.4
  TOP w0.203: R19.2 R21.1 46.99,88.75 46.8,88.94 Q3.1

## Copper pours and planes (outline as drawn; the poured copper is in the pictures)
GND on TOP: 100.6,51.31 95.48,28.98 18.08,28.98 17.01,30.05 17.01,63.88 31.64,78.51 31.64,96.59 44.29,100.07 57.4,100.11 57.4,86.28 62.58,81.1 85.64,81.1 85.22,70.83 95.13,73.56 ; 13 cut-outs
GND on BOTTOM: 100.6,51.31 95.48,28.98 18.08,28.98 17.01,30.05 17.01,63.88 31.64,78.51 31.64,96.59 44.29,100.07 57.4,100.11 57.4,86.28 62.58,81.1 85.64,81.1 85.22,70.83 95.13,73.56 ; 5 cut-outs

## Text on the board
Ref Des/Silkscreen Top: AQS1-CONTROLLER V1.3 | G | V | T | R | DL | DBG | RST
NCLEGEND-1-2: FIGURE | SIZE | 0.3048 | 0.6 | 0.7112 | 0.75 | 0.9 | 1.0 | 1.2 | DRILL CHART: TOP to BOTTOM | ALL UNITS ARE IN MILLIMETERS | PLATED | QTY | 175 | 8 | 6 | 4 | 11 | 10
